# Altium PCB PICO核心.PcbDoc (part 2 of 2)
Units mil, origin at the board's own origin, x right, y up, seen from the top; angles counter-clockwise.
Board outline 3937.01 x 3543.31 mil, 4 copper layers (Top Layer, GND, VCC, Bottom Layer), stack 23.756 mil thick; 147 components, 105 nets, 477 pads, 202 vias.
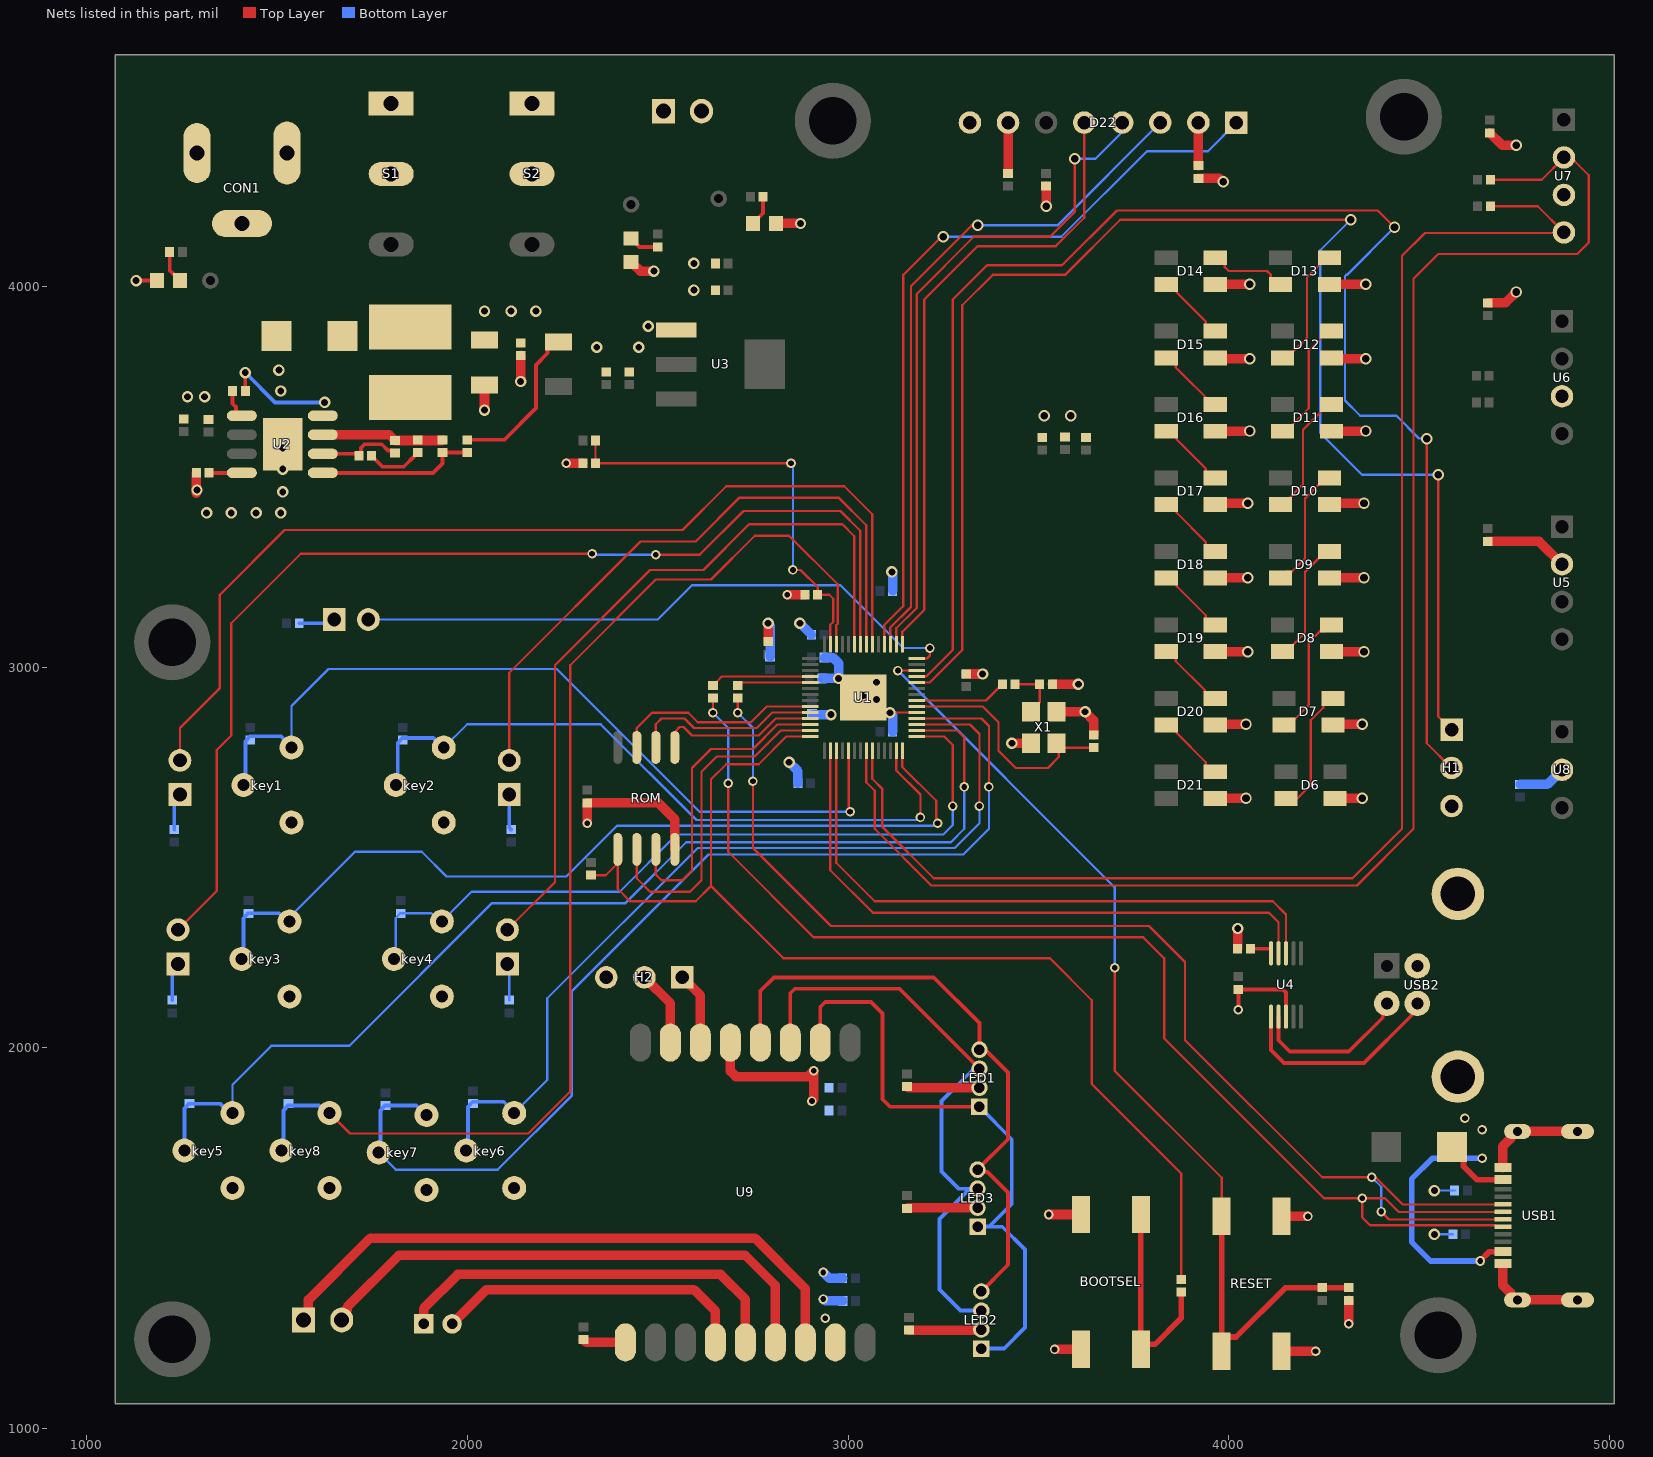
[diagram p4: the nets of this part, all layers, seen from the top]

## Via types
v1: diameter 25, hole 15, Top Layer to Bottom Layer, 71 vias
v2: diameter 30, hole 20, Top Layer to Bottom Layer, 68 vias
v3: diameter 30, hole 18, Top Layer to Bottom Layer, 63 vias

## Nets (pads, with @x,y where several pads share a name; then routed paths per layer and width w, separated by ;. In a path a pad name is that pad's centre, name@x,y a point inside that pad or via, vN(x,y) a via of type N, cw(c..) or ccw(c..) an arc to the next point about the centre after c; other vN are vias at no path point) (continued)
GND: BOOTSEL.1 C2.1 C3.1 C4.1 C5.1 C7.2 C8.1 C9.2 C10.2 C11.1 C12.2 C13.1 C14.1 C15.1 C16.1 C17.1 C18.1 C19.1 C20.1 C21.1 C22.1 C23.1 C24.1 C25.1 C26.1 C27.2 C28.1 C29.2 C30.1 C31.1 C32.1 C33.1 C34.1 C35.1 C36.1 C37.1 C38.1 C39.2 C40.2 C41.2 C42.2 CON1.2 CON1.3 D1.1 D2.2 D3.2 D4.2 D6.3 D7.3 D8.3 D9.3 D10.3 D11.3 D12.3 D13.3 D14.3 D15.3 D16.3 D17.3 D18.3 D19.3 D20.3 D21.3 D22.8 H1.3 H2.3 key1.1 key2.1 key3.1 key4.1 key5.1 key6.1 key7.1 key8.1 P1.2 R2.1 R3.1 R12.1 R13.1 R16.1 R20.2 RESET.2 ROM.4 U1.19 U1.57 U2.7 U2.9 U3.1 U4.3 U5.2 U6.3 U7.3 U8.2 U9.5 U9.16 USB1.1 USB1.12 USB1.13 USB1.14 USB1.15 USB1.16 USB2.0 USB2.4 USB2.5 X1.2 X1.4 | length 5855.8
  Top Layer w6: v3(3110,2880) 3110.63,2880.63 U1.19@3179.76,2880.63
  Top Layer w10: v3(1130,4015) D2.2@1184.37,4015 ; v1(4025,2100) C33.1@4025,2153.27 4141.73,2153.27 4150,2145 U4.3@4150,2081.93
  Top Layer w25: v3@1288.27,3456.73 C7.2@1288.27,3510 ; U2.7@1620.3,3610 1795,3610 C8.1@1810,3595 1933.27,3595 R3.1@1935,3596.73 ; v3(2045,3675) C3.1@2045,3741.34 ; v3(2140,3750) C2.1@2140,3818.27 ; v1(2260,3535) R16.1@2303.27,3535 ; v1(2315,2590) C24.1@2315,2643.27 2501.73,2643.27 2545,2600 ROM.4@2545,2521.14 ; D3.2@2430,4064.37 2430.98,4064.37 2436.79,4058.56 2436.79,4057.58 2454.37,4040 v3(2490,4040) ; U9.5@2690.64,2013.7 2690.64,1939.01 2705.28,1924.37 2894.36,1924.37 v1(2910,1940) 2910,1865 v1(2905,1860) ; C11.1@2790,3066.73 v3(2790,3115) ; D4.2@2810.31,4165 v3(2875,4165) ; v1(2840,3190) C31.1@2886.54,3190 ; C18.1@3310,2981.73 v3(3353.27,2981.73) ; v3(3430,2800) X1.4@3480,2800 ; v2(3520,4210) C35.1@3520,4263.27 ; v1(3527.16,1562.16) BOOTSEL.1@3611.26,1562.16 ; C26.1@3536.73,2955 v3(3605,2955) ; v1(3542.16,1207.84) BOOTSEL.1@3611.26,1207.84 ; X1.2@3546.93,2882.68 v3(3622.32,2882.68) 3645,2860 C25.1@3645,2821.73 ; R20.2@3920,4283.27 3975.38,4283.27 3983.65,4275 v2(3985,4275) ; D21.3@3964.47,2654.92 4044.92,2654.92 v2(4045,2655) ; D20.3@3964.47,2849.92 4044.92,2849.92 v2(4045,2850) ; D19.3@3969.47,3039.92 4049.92,3039.92 v2(4050,3040) ; D18.3@3969.47,3234.92 4049.92,3234.92 v2(4050,3235) ; D17.3@3969.47,3429.92 4049.92,3429.92 v2(4050,3430) ; D16.3@3974.47,3619.92 4054.92,3619.92 v2(4055,3620) ; D15.3@3974.47,3809.92 4054.92,3809.92 v2(4055,3810) ; D14.3@3974.47,4004.92 4054.92,4004.92 v2(4055,4005) ; C29.2@4023.27,2260 v3(4023.27,2313.27) ; RESET.2@4138.74,1202.84 v1(4227.84,1202.84) ; RESET.2@4138.74,1557.16 v1(4207.84,1557.16) ; D6.3@4269.47,2654.92 4349.92,2654.92 v2(4350,2655) ; D7.3@4269.47,2849.92 4349.92,2849.92 v2(4350,2850) ; D8.3@4274.47,3039.92 4354.92,3039.92 v2(4355,3040) ; D9.3@4274.47,3234.92 4354.92,3234.92 v2(4355,3235) ; D10.3@4274.47,3429.92 4354.92,3429.92 v2(4355,3430) ; D11.3@4279.47,3619.92 4359.92,3619.92 v2(4360,3620) ; D12.3@4279.47,3809.92 4359.92,3809.92 v2(4360,3810) ; D13.3@4279.47,4004.92 4359.92,4004.92 v2(4360,4005) ; v1(4315,1275) C27.2@4315,1336.54 ; C36.1@4680,3330 4815,3330 U5.2@4875,3270 ; C34.1@4680,3956.73 4726.73,3956.73 v2(4755,3985) ; C38.1@4685,4403.27 4718.27,4370 v2(4755,4370) ; USB1.1@4720,1433.03 4720,1376.14 4739.89,1356.25 4739.89,1344.39 4746.53,1337.76 USB1.13@4758.39,1337.76 USB1.15@4915.87,1337.76 ; USB1.12@4720,1685 4720,1741.89 4739.89,1761.78 4739.89,1773.64 4746.53,1780.28 USB1.14@4758.39,1780.28 USB1.16@4915.87,1780.28
  Bottom Layer w6: v3(4540,1510) R12.1@4588.27,1510 ; v3(4540,1625) R13.1@4593.27,1625
  Bottom Layer w25: v3(2790,3115) 2790,3113.65 2795,3108.65 C16.1@2795,3026.73 ; v3(2845,2750) 2868.27,2726.73 C12.2@2868.27,2695 ; v3(2873.27,3115) C13.1@2903.27,3085 ; C10.2@2906.73,2875 v3(2955,2875) ; C14.1@2931.73,2970 v3(2975,2970) 2975,3010.36 2960.36,3025 C19.1@2936.73,3025 ; v1(2935,1340) 2939.7,1335.3 2986.24,1335.3 C41.2@2986.54,1335 ; v1(2935,1410) 2949.97,1395.03 C39.2@2985.65,1395.03 ; v3(3110,2880) 3116.73,2873.27 C15.1@3116.73,2830 ; C17.1@3116.73,3200 v3@3116.73,3241.73 ; C9.2@3310,2981.73 v3(3353.27,2981.73) ; C37.1@4765,2691.73 4836.73,2691.73 U8.2@4875,2730
  other v1: 2940,1290
  other v2: 3515,3660 3585,3660
  other v3: 3075,2915 3040,2925 3075,2960 3115,3250 1315,3405 1380,3405 1445,3405 1510,3405 1515,3460 1290,3465 1515,3520 1515,3575 1265,3710 1310,3710 1510,3725 1505,3780 2340,3840 2450,3840 2475,3895 2595,3990 2595,4060
KEY1: key1.2 R27.1 U1.5 | length 2182.4
  Top Layer w6: U1.5@3000.63,2780.24 3001.57,2779.3 3001.57,2625.31 3000.63,2624.37 v1(3005,2620)
  Bottom Layer w6: key1.2@1537.99,2788.43 1537.99,2793.43 1537.99,2897.99 1635,2995 2235,2995 2610,2620 v1(3005,2620)
  Bottom Layer w10: key1.2@1417.01,2695 1417.01,2805.28 1422.2,2810.47 1422.2,2811.46 1429.02,2818.27 1510.64,2818.27 1535.48,2793.43 key1.2@1537.99,2793.43
KEY2: key2.2 R28.1 U1.13 | length 1833.4
  Top Layer w6: U1.13@3126.61,2780.24 3126.61,2728.39 3190,2665 v1(3190,2605)
  Bottom Layer w6: key2.2@1937.99,2788.43 1999.57,2850 2350,2850 2601.5,2598.5 3178.36,2598.5 3184.86,2605 v1(3190,2605)
  Bottom Layer w10: key2.2@1817.01,2690 1817.01,2800.28 1822.2,2805.47 1822.2,2806.46 1829.02,2813.27 1910.64,2813.27 1935.48,2788.43 key2.2@1937.99,2788.43
KEY3: key3.2 R29.1 U1.14 | length 2342.3
  Top Layer w6: U1.14@3142.36,2780.24 3142.36,2737.64 3231.36,2648.64 3231.36,2611.5 3231.36,2593.64 v1(3235,2590)
  Bottom Layer w6: key3.2@1532.99,2331.85 1532.99,2342.99 1705,2515 1880,2515 1945,2450 2260,2450 2393.5,2583.5 3223.36,2583.5 3229.86,2590 v1(3235,2590)
  Bottom Layer w10: key3.2@1412.01,2230 1412.01,2340.28 1417.2,2345.47 1417.2,2346.46 1424.02,2353.27 R29.1@1425,2353.27 1505.64,2353.27 key3.2@1530.02,2328.88
KEY4: key4.2 R30.1 U1.15 | length 2014
  Top Layer w6: U1.15@3179.76,2817.64 3252.36,2817.64 3275,2795 v1(3275,2635)
  Bottom Layer w6: key4.2@1812.01,2230 1812.01,2340.28 1817.2,2345.47 1817.2,2346.46 1824.02,2353.27 R30.1@1825,2353.27 1905.64,2353.27 1930.48,2328.43 key4.2@1937.99,2328.43 ; key4.2@1932.99,2331.85 2011.14,2410 2400,2410 2550,2560 3250,2560 3275,2585 v1(3275,2635)
KEY5: key5.2 R31.1 U1.16 | length 2900.3
  Top Layer w6: U1.16@3179.76,2833.39 3286.61,2833.39 3305,2815 v1(3305,2685)
  Bottom Layer w6: key5.2@1382.99,1828.42 1382.99,1902.99 1485,2005 1690,2005 2065,2380 2415,2380 2575,2540 3270,2540 3305,2575 v1(3305,2685)
  Bottom Layer w10: key5.2@1257.01,1730 1257.01,1840.28 1262.2,1845.47 1262.2,1846.46 1269.02,1853.27 R31.1@1270,1853.27 1350.64,1853.27 1375.48,1828.42 key5.2@1382.99,1828.42
KEY6: key6.2 R32.1 U1.17 | length 2325.4
  Top Layer w6: U1.17@3179.76,2849.13 3320,2849.13 3345,2824.13 v1(3345,2635)
  Bottom Layer w6: key6.2@2122.99,1828.42 2127.99,1833.42 2210,1915.43 2210,2130 2605,2525 3280,2525 3345,2590 v1(3345,2635)
  Bottom Layer w10: key6.2@2002.01,1735 2002.01,1845.28 2007.2,1850.47 2007.2,1851.46 2014.02,1858.27 2095.64,1858.27 2120.48,1833.42 key6.2@2127.99,1833.42
KEY7: key7.2 R33.1 U1.18 | length 2874.1
  Top Layer w6: U1.18@3179.76,2864.88 3350.12,2864.88 3370,2845 v1(3370,2685)
  Bottom Layer w6: key7.2@1767.01,1725 1812.01,1680 2080,1680 2274.53,1874.53 2274.53,2149.01 2633.01,2507.5 3302.5,2507.5 3370,2575 v1(3370,2685)
  Bottom Layer w10: key7.2@1772.01,1725 1772.01,1835.28 1777.2,1840.47 1777.2,1841.46 1784.02,1848.27 R33.1@1785,1848.27 1865.64,1848.27 1890.48,1823.42 key7.2@1892.99,1823.42 key7.2@1897.99,1823.42
KEY8: key8.2 R34.1 U1.40 | length 3127.7
  Top Layer w6: key8.2@1637.99,1828.42 1691.42,1775 2160,1775 2270,1885 2270,3005 2495,3230 2640,3230 2755,3345 2845,3345 2972.73,3217.27 2972.73,3113.36 2969.13,3109.76 U1.40@2969.13,3059.76
  Bottom Layer w10: key8.2@1517.01,1725 1517.01,1835.28 1522.2,1840.47 1522.2,1841.46 1529.02,1848.27 1610.64,1848.27 1635.48,1823.42 key8.2@1642.99,1823.42
LED1: D23.2 U1.34 | length 2682.4
  Top Layer w6: D23.2@1245,2754.88 1245,2840 1350,2945 1350,3190 1520,3360 2565,3360 2680,3475 2990,3475 3063.62,3401.38 U1.34@3063.62,3059.76
LED2: D24.2 U1.35 | length 1701.1
  Top Layer w6: D24.2@2110,2754.88 2110,2985 2455,3330 2600,3330 2715,3445 2975,3445 3047.87,3372.13 U1.35@3047.87,3059.76
LED3: D25.2 U1.36 | length 2959.1
  Top Layer w6: D25.2@1240,2310 1342,2412 1342,2782 1380,2820 1380,3115 1562.5,3297.5 v1(2327.5,3297.5) ; v1(2495,3295) 2610,3295 2725,3410 2980,3410 3032.13,3357.87 U1.36@3032.13,3059.76
  Bottom Layer w6: v1(2327.5,3297.5) 2330,3295 v1(2495,3295)
LED4: D26.2 U1.37 | length 1983.3
  Top Layer w6: D26.2@2105,2310 2230,2435 2230,3005 2480,3255 2620,3255 2740,3375 2985,3375 3016.38,3343.62 U1.37@3016.38,3059.76
LED5: D27.2 U1.28 | length 1639
  Top Layer w6: U1.28@3179.76,3022.36 3207.36,3022.36 3215,3030 v1(3215,3050)
  Bottom Layer w6: D27.2@1740,3125 2500,3125 2590,3215 2980,3215 3145,3050 v1(3215,3050)
MC+: MIC.1 U9.13 | length 1062.9
  Top Layer w25: MIC.1@1885,1275 1885,1315 1975,1405 2665,1405 2730.01,1339.99 U9.13@2730.01,1226.3
MC-: MIC.2 U9.12 | length 834.5
  Top Layer w25: MIC.2@1959.8,1275 1960,1275 2050,1365 2595,1365 2651.28,1308.72 U9.12@2651.28,1226.3
NetBOOTSEL1_2: BOOTSEL.2 R10.1 | length 562.9
  Top Layer w15: BOOTSEL.2@3768.74,1562.16 BOOTSEL.2@3768.74,1207.84 3781.98,1221.08 3806.08,1221.08 3875,1290 R10.1@3875,1358.27
NetC1_1: C1.1 D1.2 L1.1 U2.8 | length 289
  Top Layer w10: C1.1@1416.73,3725 v3(1416.73,3773.27)
  Bottom Layer w10: v3(1416.73,3773.27) 1495,3695 v3(1625,3695)
NetC1_2: C1.2 U2.1 | length 79.5
  Top Layer w10: C1.2@1383.27,3725 1383.27,3691.73 1392.08,3682.92 1392.08,3668.11 1400.19,3660 U2.1@1407.7,3660
NetC2_2: C2.2 C3.2 F1.1 L1.2 R1.2 | length 420.2
  Top Layer w10: R1.2@2000,3596.73 2096.73,3596.73 2180,3680 2180,3793.66 2210.55,3824.22 2210.55,3836.42 2227.8,3853.66 F1.1@2240,3853.66
  other v3: 2045,3935 2115,3935 2180,3935
NetC6_1: C6.1 R2.2 | length 150.1
  Top Layer w10: C6.1@1748.46,3555 1748.46,3554.02 1755.28,3547.2 1756.26,3547.2 1777.46,3526 1832.73,3526 1862.2,3555.47 1862.2,3556.46 1869.02,3563.27 R2.2@1870,3563.27
NetC6_2: C6.2 C8.2 U2.6 | length 222.7
  Top Layer w10: U2.6@1620.3,3560 1710,3560 C6.2@1715,3555 1720.41,3560.41 1720.41,3575.41 1730,3585 1775,3585 1791.65,3568.35 1803.19,3568.35 C8.2@1810,3561.54
NetC7_1: C7.1 U2.4 | length 86
  Top Layer w10: C7.1@1321.73,3510 U2.4@1407.7,3510
NetC25_2: C25.2 U1.20 X1.1 | length 627.3
  Top Layer w6: U1.20@3179.76,2896.38 3353.62,2896.38 3395,2855 3395,2780 3440,2735 3525,2735 3553.46,2763.46 3553.46,2798.66 3563.86,2788.27 C25.2@3645,2788.27
NetC26_2: C26.2 R11.1 X1.3 | length 146.8
  Top Layer w6: R11.1@3438.46,2955 C26.2@3503.27,2955 3503.27,2907.91 3480,2884.65 X1.3@3480,2882.68
NetC29_1: C29.1 U4.10 | length 65.5
  Top Layer w10: C29.1@4056.73,2260 4110.16,2260 4110.63,2259.53 U4.10@4110.63,2248.07
NetCON1_1: CON1.1 S1.1 S1.2
NetD2_1: D2.1 R4.1 | length 86.6
  Top Layer w10: R4.1@1218.27,4090 1218.27,4041.73 1230.71,4029.29 1231.69,4029.29 1245,4015.98 D2.1@1245,4015
NetD3_1: D3.1 R5.1 | length 79.6
  Top Layer w10: D3.1@2430,4125 2430.98,4125 2444.29,4111.69 2444.29,4110.71 2451.73,4103.27 R5.1@2500,4103.27
NetD4_1: D4.1 R6.1 | length 81.8
  Top Layer w10: D4.1@2749.68,4165 2749.68,4165.98 2762.99,4179.29 2763.98,4179.29 2776.73,4192.05 R6.1@2776.73,4235
NetD6_2: D6.2 D7.4 | length 337.3
  Top Layer w6: D6.2@4150,2654.92 4179.92,2654.92 4215,2690 4215,2860 4248.02,2893.02 4248.02,2901.24 4264.64,2917.86 D7.4@4273.94,2917.86
NetD7_2: D7.2 D8.4 | length 330
  Top Layer w6: D7.2@4145,2847.78 4161.63,2864.41 4174.41,2864.41 4210,2900 4210,3065 4239.1,3094.1 4252.84,3094.1 D8.4@4269.47,3110.73
NetD8_2: D8.2 D9.4 | length 326.5
  Top Layer w6: D8.2@4140.53,3040.65 4157.16,3057.27 4167.27,3057.27 4200,3090 4200,3249.91 4253.68,3303.59 D9.4@4264.47,3303.59
NetD9_2: D9.2 D10.4 | length 330.3
  Top Layer w6: D9.2@4135.53,3233.51 4152.16,3250.14 4165.14,3250.14 4200,3285 4200,3442.77 4237.06,3479.82 4239.36,3479.82 4255.98,3496.45 D10.4@4264.47,3496.45
NetD10_2: D10.2 D11.4 | length 329.7
  Top Layer w6: D10.2@4135.53,3426.37 4146.32,3426.37 4162.94,3443 4162.94,3447.94 4195,3480 4195,3623.33 4260.98,3689.31 D11.4@4269.47,3689.31
NetD11_2: D11.2 D12.4 | length 326.4
  Top Layer w6: D11.2@4140.53,3619.24 4156.56,3635.27 4165.27,3635.27 4210,3680 4210,3831.19 4260.98,3882.18 D12.4@4269.47,3882.18
NetD12_2: D12.2 D13.4 | length 326
  Top Layer w6: D12.2@4140.53,3812.1 4154.86,3826.43 4166.43,3826.43 4205,3865 4205,4024.06 4255.98,4075.04 D13.4@4264.47,4075.04
NetD13_2: D13.2 D14.4 | length 210
  Top Layer w6: D14.4@3964.47,4075.04 3972.95,4075.04 3989.58,4058.41 3989.58,4049.93 3999.51,4040 4100.49,4040 4110.42,4030.07 4110.42,4021.59 4127.05,4004.96 D13.2@4135.53,4004.96
NetD14_2: D14.2 D15.4 | length 187.5
  Top Layer w6: D14.2@3835.53,4004.96 3846.32,4004.96 3862.94,3988.33 3862.94,3983.7 3939.36,3907.29 3939.36,3898.8 3955.98,3882.18 D15.4@3964.47,3882.18
NetD15_2: D15.2 D16.4 | length 185.3
  Top Layer w6: D15.2@3835.53,3812.1 3844.02,3812.1 3860.64,3795.47 3860.64,3786.99 3958.91,3688.72 3963.88,3688.72 D16.4@3964.47,3689.31
NetD16_2: D16.2 D17.4 | length 187.5
  Top Layer w6: D16.2@3835.53,3619.24 3846.32,3619.24 3862.94,3602.61 3862.94,3597.98 3939.36,3521.56 3939.36,3513.08 3955.98,3496.45 D17.4@3964.47,3496.45
NetD17_2: D17.2 D18.4 | length 187.5
  Top Layer w6: D17.2@3835.53,3426.37 3846.32,3426.37 3862.94,3409.75 3862.94,3405.11 3939.36,3328.7 3939.36,3320.21 3955.98,3303.59 D18.4@3964.47,3303.59
NetD18_2: D18.2 D19.4 | length 187.5
  Top Layer w6: D18.2@3835.53,3233.51 3846.32,3233.51 3862.94,3216.88 3862.94,3212.25 3939.36,3135.84 3939.36,3127.35 3955.98,3110.73 D19.4@3964.47,3110.73
NetD19_2: D19.2 D20.4 | length 187.5
  Top Layer w6: D19.2@3835.53,3040.65 3844.02,3040.65 3860.64,3024.02 3860.64,3015.54 3937.06,2939.12 3937.06,2934.49 3953.68,2917.86 D20.4@3964.47,2917.86
NetD20_2: D20.2 D21.4 | length 187.5
  Top Layer w6: D20.2@3835.53,2847.78 3846.32,2847.78 3862.94,2831.16 3862.94,2826.52 3939.36,2750.11 3939.36,2741.63 3955.98,2725 D21.4@3964.47,2725
NetD22_2: D22.2 R20.1 | length 113.3
  Top Layer w25: R20.1@3920,4316.73 D22.2@3920,4430
NetD22_7: D22.7 R19.1 | length 133.3
  Top Layer w25: R19.1@3420,4296.73 D22.7@3420,4430
NetD23_1: D23.1 R35.1 | length 97.9
  Bottom Layer w10: R35.1@1230,2573.46 1230,2650.12 D23.1@1245,2665.12
NetD24_1: D24.1 R36.1 | length 93.7
  Bottom Layer w10: D24.1@2110,2665.12 2110,2578.46 R36.1@2115,2573.46
NetD25_1: D25.1 R37.1 | length 101.4
  Bottom Layer w10: R37.1@1225,2125 1225,2205.24 D25.1@1240,2220.24
NetD26_1: D26.1 R38.1 | length 97.3
  Bottom Layer w6: D26.1@2105,2220.24 2110,2215.24 R38.1@2110,2125
NetD27_1: D27.1 R39.1 | length 95.9
  Bottom Layer w10: R39.1@1558.46,3115 1640.24,3115 D27.1@1650.24,3125
NetH1_1: H1.1 U1.24 | length 3807.1
  Top Layer w6: U1.24@3179.76,2959.37 3214.37,2959.37 3300,3045 3300,3950 3380,4030 3570,4030 3715,4175 v2(4320,4175) ; v2(4550,3505) 4550,2870 H1.1@4585,2835
  Bottom Layer w6: v2(4320,4175) 4240,4095 4240,3615 4350,3505 v2(4550,3505)
NetH1_2: H1.2 U1.25 | length 3977.4
  Top Layer w6: U1.25@3179.76,2975.12 3180.25,2975.6 3205.6,2975.6 3275,3045 3275,3965 3365,4055 3562,4055 3706,4199 4391,4199 v2(4435,4155) ; v2(4520,3600) 4520,2800 H1.2@4585,2735
  Bottom Layer w6: v2(4435,4155) 4310,4030 4308.51,4030 4305,4026.49 4305,3700 4345,3660 4440,3660 4499.51,3600.49 4519.51,3600.49 v2(4520,3600)
NetH2_1: H2.1 U9.6 | length 190.7
  Top Layer w25: H2.1@2565,2185 2611.89,2138.11 U9.6@2611.89,2013.7
NetH2_2: H2.2 U9.7 | length 199.5
  Top Layer w25: H2.2@2465,2185 2533.16,2116.84 U9.7@2533.16,2013.7
NetLED1_2: LED1.2 R23.1 | length 191.4
  Top Layer w25: R23.1@3155,1898.27 3158.27,1895 LED1.2@3345,1895
NetLED2_2: LED2.2 R25.1 | length 190.7
  Top Layer w10: LED2.2@3348.27,1258.27 LED2.2@3350,1260
  Top Layer w25: R25.1@3160,1258.27 LED2.2@3348.27,1258.27
NetLED3_2: LED3.2 R26.1 | length 185.7
  Top Layer w25: R26.1@3155,1578.27 3156.73,1580 LED3.2@3340,1580
NetP1_1: P1.1 S2.1 S2.2
NetR1_1: R1.1 R3.2 U2.5 | length 418.3
  Top Layer w10: U2.5@1620.3,3510 1910,3510 1935,3535 R3.2@1935,3563.27 R1.1@2000,3563.27
NetR7_1: R7.1 U1.47 | length 193.4
  Top Layer w6: R7.1@2710,2951.73 2717.64,2959.37 U1.47@2900.24,2959.37
NetR8_1: R8.1 U1.46 | length 265.5
  Top Layer w6: R8.1@2645,2951.73 2645.98,2951.73 2654.8,2960.54 2654.8,2961.53 2668.39,2975.12 U1.46@2900.24,2975.12
NetR11_2: R11.2 U1.21 | length 243.6
  Top Layer w6: U1.21@3179.76,2912.13 3362.13,2912.13 3395.2,2945.2 3396.19,2945.2 3405,2954.02 R11.2@3405,2955
NetR24_2: R24.2 U9.9 | length 112.9
  Top Layer w25: R24.2@2305,1233.27 2311.97,1226.3 U9.9@2415.05,1226.3
NetU4_1: U4.1 USB2.3 | length 560.7
  Top Layer w10: U4.1@4110.63,2081.93 4110.63,1994.37 4145,1960 4355,1960 4479.02,2084.02 4479.02,2085.19 4495,2101.17 USB2.3@4495,2116.57
NetU4_2: U4.2 USB2.2 | length 427.2
  Top Layer w10: U4.2@4130.31,2081.93 4130.31,2019.68 4160,1990 4315,1990 4404.11,2079.11 4404.11,2105.68 USB2.2@4415,2116.57
PWM3: LED1.1 LED2.1 LED3.1 U9.2 | length 1660.2
  Top Layer w10: U9.2@2926.85,2013.7 2926.85,2106.85 2940,2120 3060,2120 3090,2090 3090,1865 3110,1845 LED1.1@3345,1845
  Bottom Layer w10: LED1.1@3345,1845 3430,1760 3430,1590 3370.8,1530.8 3340.8,1530.8 LED3.1@3340,1530 3405,1530 3465,1470 3465,1265 3410,1210 LED2.1@3350,1210
PWM4: LED1.3 LED2.3 LED3.3 U9.3 | length 1583
  Top Layer w10: U9.3@2848.12,2013.7 2848.12,2143.12 2860,2155 3135,2155 LED1.3@3345,1945
  Bottom Layer w10: LED3.3@3340,1630 LED3.3@3320,1630 ; LED1.3@3345,1945 3330,1945 3245,1860 3245,1675 3290,1630 LED3.3@3320,1630 ; LED2.3@3350,1310 3295,1310 3240,1365 3240,1550 LED3.3@3320,1630
PWM5: LED1.4 LED2.4 LED3.4 U9.4 | length 1627.6
  Top Layer w10: U9.4@2769.38,2013.7 2769.38,2149.38 2805,2185 3225,2185 3345,2065 LED1.4@3345,1995 3351.37,1988.63 3366.37,1988.63 3420,1935 3420,1760 LED3.4@3340,1680 3345.92,1674.08 3365.92,1674.08 3420,1620 3420,1430 LED2.4@3350,1360
QSPI_SCLK: ROM.6 U1.52 | length 499.8
  Top Layer w6: ROM.6@2495,2788.86 2495,2850 2510,2865 2570,2865 2595,2840 2760,2840 2800.63,2880.63 U1.52@2900.24,2880.63
QSPI_SD0: ROM.5 U1.53 | length 429.5
  Top Layer w6: ROM.5@2545,2788.86 2548.37,2792.23 2548.37,2833.39 2557.5,2842.51 2567.49,2842.51 2590,2820 2765,2820 2809.88,2864.88 U1.53@2900.24,2864.88
QSPI_SD1: ROM.2 U1.55 | length 888.2
  Top Layer w6: ROM.2@2445,2521.14 2445,2445 2480,2410 2585,2410 2615,2440 2615,2725 2655,2765 2755,2765 2823.39,2833.39 U1.55@2900.24,2833.39
QSPI_SD2: ROM.3 U1.54 | length 805.2
  Top Layer w6: ROM.3@2495,2521.14 2495,2455 2510,2440 2565,2440 2590,2465 2590,2735 2640,2785 2750,2785 2814.13,2849.13 U1.54@2900.24,2849.13
QSPI_SD3: ROM.7 U1.51 | length 550.4
  Top Layer w6: ROM.7@2445,2788.86 2445,2840 2485,2880 2580,2880 2605,2855 2745,2855 2786.38,2896.38 U1.51@2900.24,2896.38
QSPI_SS: R9.1 R10.2 ROM.1 U1.56 | length 3003.6
  Top Layer w6: R9.1@2325,2453.27 2363.27,2453.27 ROM.1@2395,2485 ; ROM.1@2395,2521.14 ROM.1@2395,2485 ; U1.56@2900.24,2817.64 2837.64,2817.64 2765,2745 2680,2745 2640,2705 2640,2425 ; R10.2@3875,1391.73 3875,1670 3640,1905 3640,2125 3530,2235 2830,2235 2640,2425 ; ROM.1@2395,2485 2395,2417.5 2427.5,2385 2600,2385 2640,2425
RUN: C27.1 R14.1 RESET.1 U1.26 | length 2583.4
  Top Layer w6: v1(3130.87,2990.87) U1.26@3179.76,2990.87 ; v1(3700,2210) 3700,1940 3981.26,1658.74 RESET.1@3981.26,1557.16
  Top Layer w15: RESET.1@3981.26,1202.84 RESET.1@3981.26,1224.04 ; RESET.1@3981.26,1557.16 RESET.1@3981.26,1224.04 ; C27.1@4315,1370 R14.1@4245,1370 4148.43,1370 4018.59,1240.16 3997.38,1240.16 RESET.1@3981.26,1224.04
  Bottom Layer w6: v1(3130.87,2990.87) 3700,2421.73 v1(3700,2210)
SP+: C43.1 U9.15 | length 1626.1
  Top Layer w25: C43.1@1569.9,1285 1582.72,1297.82 1582.72,1337.72 1745,1500 2755,1500 2887.5,1367.5 U9.15@2887.5,1226.3
SP-: C43.2 U9.14 | length 1403.5
  Top Layer w25: C43.2@1670,1285 1670,1296.97 1683.98,1310.95 1683.98,1318.98 1820,1455 2730,1455 2808.75,1376.25 U9.14@2808.75,1226.3
SPI_CLK: D22.5 U1.29 | length 1688.2
  Top Layer w6: U1.29@3142.36,3059.76 3142.36,3092.36 3200,3150 3200,3965 3340,4105 3545,4105 3620,4180 D22.5@3620,4430
SPI_DC: D22.3 U1.31 | length 1795.8
  Top Layer w6: U1.31@3110.87,3059.76 3110.87,3103.9 3165,3158.03 3165,4000 3325,4160 v2(3340,4160)
  Bottom Layer w6: v2(3340,4160) 3550,4160 D22.3@3820,4430
SPI_MOSI: D22.4 U1.30 | length 1765.4
  Top Layer w6: U1.30@3126.61,3059.76 3126.61,3101.61 3180,3155 3180,3980 3330,4130 3530,4130 3595,4195 v2(3595,4335)
  Bottom Layer w6: v2(3595,4335) 3650,4335 3720,4405 D22.4@3720,4430
SPI_RST: D22.1 U1.32 | length 2033.7
  Top Layer w6: U1.32@3095.12,3059.76 3095.12,3110.12 3145,3160 3145,4030 v2@3250,4135
  Bottom Layer w6: v2(3250,4130) 3560,4130 3785,4355 3945,4355 D22.1@4020,4430
ttl_rx: U1.3 U4.8 | length 1633.4
  Top Layer w6: U1.3@2969.13,2780.24 2969.13,2485.87 3070,2385 4115,2385 4150,2350 U4.8@4150,2248.07
ttl_tx: U1.2 U4.9 | length 1628.9
  Top Layer w6: U1.2@2953.39,2780.24 2953.39,2466.61 3065,2355 4105,2355 4130.31,2329.68 U4.9@4130.31,2248.07
USB_D+: R7.2 USB1.6 USB1.8 | length 3316.8
  Top Layer w6: v1(2710,2880) R7.2@2710,2918.27 ; v1(2750,2700) 2750,2525 2955,2320 3790,2320 3885,2225 3885,2020 4245,1660 v1(4375,1660) 4385,1660 4456.46,1588.54 USB1.8@4720,1588.54 ; v1(4400,1570) 4420.83,1549.17 USB1.6@4720,1549.17
  Bottom Layer w6: v1(2710,2880) 2750,2840 v1(2750,2700) ; v1(4375,1660) 4400,1635 v1(4400,1570)
USB_D-: R8.2 USB1.5 USB1.7 | length 3400.3
  Top Layer w6: v1(2645,2880) R8.2@2645,2918.27 ; v1(2685,2695) 2685,2515 2910,2290 3775,2290 3830,2235 3830,2025 4250,1605 v1(4350,1605) ; USB1.5@4720,1529.49 4703.27,1529.49 4698.76,1534 4371,1534 4350,1555 v1(4350,1605) ; USB1.7@4720,1568.86 4446.14,1568.86 4410,1605 v1(4350,1605)
  Bottom Layer w6: v1(2645,2880) 2685,2840 v1(2685,2695)
V_SCL: R21.1 U1.9 U7.4 | length 3863
  Top Layer w6: U1.9@3063.62,2780.24 3063.62,2706.38 3090,2680 3090,2580 3225,2445 4325,2445 4455,2575 4455,4080 4515,4140 4878.43,4140 U7.4@4880,4141.57 4811.57,4210 R21.1@4686.73,4210
V_SDA: R22.1 U1.8 U7.2 | length 4171.8
  Top Layer w6: U1.8@3047.87,2780.24 3047.87,2697.13 3070,2675 3070,2575 3218.5,2426.5 4336.5,2426.5 4485,2575 4485,4020 4550,4085 4915,4085 4945,4115 4945,4291.71 4908.44,4328.27 4904.51,4328.27 4898.29,4334.49 U7.2@4898.29,4338.43 ; R22.1@4695.54,4288.81 R22.1@4686.73,4280 4821.57,4280 U7.2@4880,4338.43
Vsys: C31.2 R15.1 R16.2 U1.41 | length 1126.6
  Top Layer w6: R15.1@2336.73,3595 R16.2@2336.73,3535 v1(2850,3535) ; v1(2855,3255) 2875,3255 2920,3210 C31.2@2920,3190 ; C31.2@2920,3189.66 2950.34,3189.66 2960.73,3179.27 2960.73,3118.33 2953.39,3110.98 U1.41@2953.39,3059.76
  Bottom Layer w6: v1(2850,3535) 2850,3529.86 2855,3524.86 v1(2855,3255)
VUSBC: D5.2 USB1.2 USB1.11 | length 825.5
  Top Layer w15: D5.2@4586.62,1740 4616.09,1710.53 4616.09,1688.91 4651.5,1653.5 USB1.11@4720,1653.5 ; v1(4660,1440) 4684.13,1464.13 4719.6,1464.13 USB1.2@4720,1464.53
  Bottom Layer w15: v1(4660,1440) 4530,1440 4480,1490 4480,1655 4535,1710 v1(4665,1710)
  other v1: 4665,1785 4620,1815
pads on no net: D21.2 U2.3 U4.4 U4.5 U4.6 USB1.3 USB1.9 USB2.1

## Polygon pours and split planes (outlines as drawn)
GND on GND (split plane): 4991.91,1085.1 1095.1,1085.1 1095.1,4588.21 4991.91,4588.21
GND on VCC (split plane): 4991.91,1085.1 1095.1,1085.1 1095.1,4588.21 4991.91,4588.21
3V3 on VCC (split plane): 4914.93,1950 4914.93,1855.07 4705,1855.07 4702.06,1854.78 4699.23,1853.93 4696.63,1852.53 4694.34,1850.66 4692.47,1848.37 4691.07,1845.77 4690.22,1842.94 4689.93,1840 4689.93,1275 4690.22,1272.06 4691.07,1269.23 4692.47,1266.63 4694.34,1264.34 4696.63,1262.47 4699.23,1261.07 4702.06,1260.22 4705,1259.93 4919.93,1259.93 4919.93,1175.82 1180.82,1175.82 1180.82,4489.18 4914.93,4489.18
5V on VCC (split plane): 4114.92,2605.08 3715.08,2605.08 3715.08,3445 3714.77,3448.92 3713.85,3452.75 3712.34,3456.38 3710.29,3459.74 3707.73,3462.73 3704.74,3465.29 3701.38,3467.34 3697.75,3468.85 3693.92,3469.77 3690,3470.08 2200.08,3470.08 2200.08,3699.92 3655,3699.92 3658.92,3700.23 3662.75,3701.15 3666.38,3702.66 3669.74,3704.71 3672.73,3707.27 3675.29,3710.26 3677.34,3713.62 3678.85,3717.25 3679.77,3721.08 3680.08,3725 3680.08,4104.92 4114.92,4104.92

## Other copper
Top Layer:
  rectangle net GND: 3475,3590 3650,3665
  rectangle net 5V: 3475,3505 3650,3580
  rectangle net GND: 2895,1775 2960,1955
  rectangle net 3V3: 2980,1780 3045,2060
  rectangle net GND: 2935,1175 2995,1430
  rectangle net 5V: 3015,1175 3105,1430
  rectangle net VUSBC: 4545,1690 4685,1830
  rectangle net 5V: 4355,1695 4500,1875
  rectangle net 3V3: 2675,3730 2820,4090
  rectangle net GND: 2570,3840 2660,4090
  rectangle net GND: 2450,3840 2610,3920
  rectangle net GND: 2330,3765 2470,3920
  rectangle net 5V: 2205,3645 2605,3755
  rectangle net NetP1_1: 2030,4250 2550,4535
  rectangle net NetC2_2: 1740,3840 2295,3960
  rectangle net NetC1_1: 1660,3640 1960,3800
  rectangle net NetC1_1: 1585,3640 1715,3940
  rectangle net GND: 1520,3590 1660,3625
  rectangle net GND: 1240,3640 1335,3765
  rectangle net GND: 1275,3380 1500,3470
  rectangle net GND: 1465,3380 1570,3945
  rectangle net 12V: 1645,3985 1930,4170
  rectangle net 12V: 1295,3975 1930,4085
  rectangle net 12V: 1295,3855 1390,4070
  rectangle net 12V: 1145,3845 1390,3935
  rectangle net 12V: 1145,3550 1230,3935
  rectangle net 12V: 1160,3550 1350,3630
  rectangle net NetCON1_1: 1480,4230 1935,4550
Bottom Layer:
  rectangle net 3V3: 2675,3730 2820,4090
  rectangle net VUSBC: 4545,1690 4685,1830
  rectangle net 5V: 4355,1695 4500,1875
  rectangle net NetC2_2: 1740,3840 2295,3960
  rectangle net GND: 2895,1780 2960,2040
  rectangle net 3V3: 2975,1780 3035,2040
  rectangle net 5V: 2205,3645 2605,3755
VCC (plane layer: these items are gaps in the copper):
  lines w30: 4930,4505 4930,1950 4930,1840 4705,1840 4705,1275 4715,1275 4935,1275 4935,1160
  lines w31.5: 4930,4505 1165,4505 1165,1160 4885,1160 4935,1160
  lines w50: 2175,3720 2175,3445 3660,3445 3690,3445 3690,2580 4140,2580 4140,4130 3655,4130 3655,3725 2185,3725

## Silkscreen, mask and mechanical layers (free items; w line width, h text height)
Top Overlay:
  lines w31.5: 1135,1415 1125,1405 1125,1105 3510,1105 ; 1320,3305 2225,3305 ; 1335,3305 1125,3305 ; 2225,2365 3510,2365 3510,1105 ; 3080,4520 3080,4570 ; 3080,4555 3080,3305 ; 3095,4215 4445,4215 4445,2540 ; 3490,2365 3700,2365 3700,2540 ; 4970,1285 4970,1105 3510,1105 ; 4975,1870 4975,2550 ; 1125,3305 1125,4570 3080,4570 ; 1125,3305 1125,1410 2225,1410 2225,3305 ; 2225,3305 3080,3305 ; 3080,3305 3655,3305 3655,2900 3700,2900 3700,2540 ; 3080,4570 4975,4570 4975,2540 4710,2540 4445,2540 ; 3700,2540 4445,2540
  text "5V" at 2720,4420 h80
  text "LCD" at 4090,4395 h60
  text "-" at 2650,4265 h80
  text "SENSOR_SYS" at 4075,4265 h80
  text "+" at 2465,4255 h80
  text "LED_BOB" at 3145,3790 h80
  text "POWER" at 2590,3360 h80
  text "车内灯" at 1625,3220 h60
  text "CAR_SYS" at 1200,3210 h80
  text "CORE" at 2300,3165 h80
  text "SWD" at 4485,2945 h60
  text "车门1" at 1480,2895 h60
  text "车门2" at 1880,2895 h60
  text "车门灯1" at 1180,2540 h60
  text "车门灯2" at 2030,2535 h60
  text "AI_SYS" at 3220,2270 h80
  text "程序下载接口" at 2685,2145 h80
  text "车门灯3" at 1185,2090 h60
  text "CORE_FUN" at 3555,2080 h80
  text "车门灯4" at 1995,2015 h60
  text "车门3" at 1400,1990 h60
  text "车门4" at 1800,1985 h60
  text "车上电" at 2010,1480 h60
  text "车钥匙开门" at 1150,1470 h60
  text "锁止器" at 1475,1470 h60
  text "车顶灯开关" at 1675,1470 h60
  text "喇叭" at 1350,1315 h60
Bottom Overlay:
  drawing of 7841 lines, arcs and shapes, not listed
  text "GND" at 3355,4510 h35
  text "BL" at 3435,4510 h35
  text "VCC" at 3560,4510 h35
  text "CLK" at 3665,4510 h35
  text "MISO" at 3785,4510 h35
  text "DC" at 3860,4510 h35
  text "CS" at 3950,4510 h35
  text "RST" at 4060,4510 h35
  text "VCC" at 4965,4485 h35 r90
  text "SDA" at 4965,4375 h35 r90
  text "距离传感器" at 4790,4320 h60 r90
  text "GND" at 4965,4270 h35 r90
  text "SCL" at 4965,4165 h35 r90
  text "VCC" at 4970,3955 h35 r90
  text "温湿度传感器" at 4780,3885 h60 r90
  text "SDA" at 4970,3845 h35 r90
  text "GND" at 4970,3740 h35 r90
  text "SCL" at 4970,3635 h35 r90
  text "VCC" at 4970,3415 h35 r90
  text "PICO_MAGIX" at 3635,3385 h200
  text "GND" at 4970,3295 h35 r90
  text "气体传感器" at 4790,3250 h60 r90
  text "D" at 4970,3165 h35 r90
  text "A" at 4970,3085 h35 r90
  text "CLK" at 4530,2880 h35 r90
  text "A" at 4960,2840 h35 r90
  text "DIO" at 4530,2770 h35 r90
  text "GND" at 4960,2765 h35 r90
  text "GND" at 4530,2675 h35 r90
  text "VCC" at 4960,2655 h35 r90
  text "光强传感器" at 4795,2605 h60 r90
  text "PICO Hardware" at 3880,2040 h80
  text "Open Hardware" at 4165,1250 h80
Mechanical 13:
  lines w50: 5012.01,1347.99 5012.01,1065 1075,1065 1075,4608.31 5012.01,4608.31 5012.01,1772.01